# Altium PCB PCB1.PcbDoc
Units mil, origin at the board's own origin, x right, y up, seen from the top; angles counter-clockwise.
Board outline 1145 x 1300 mil, 2 copper layers (Top Layer, Bottom Layer); 4 components, 4 nets, 16 pads, 0 vias.
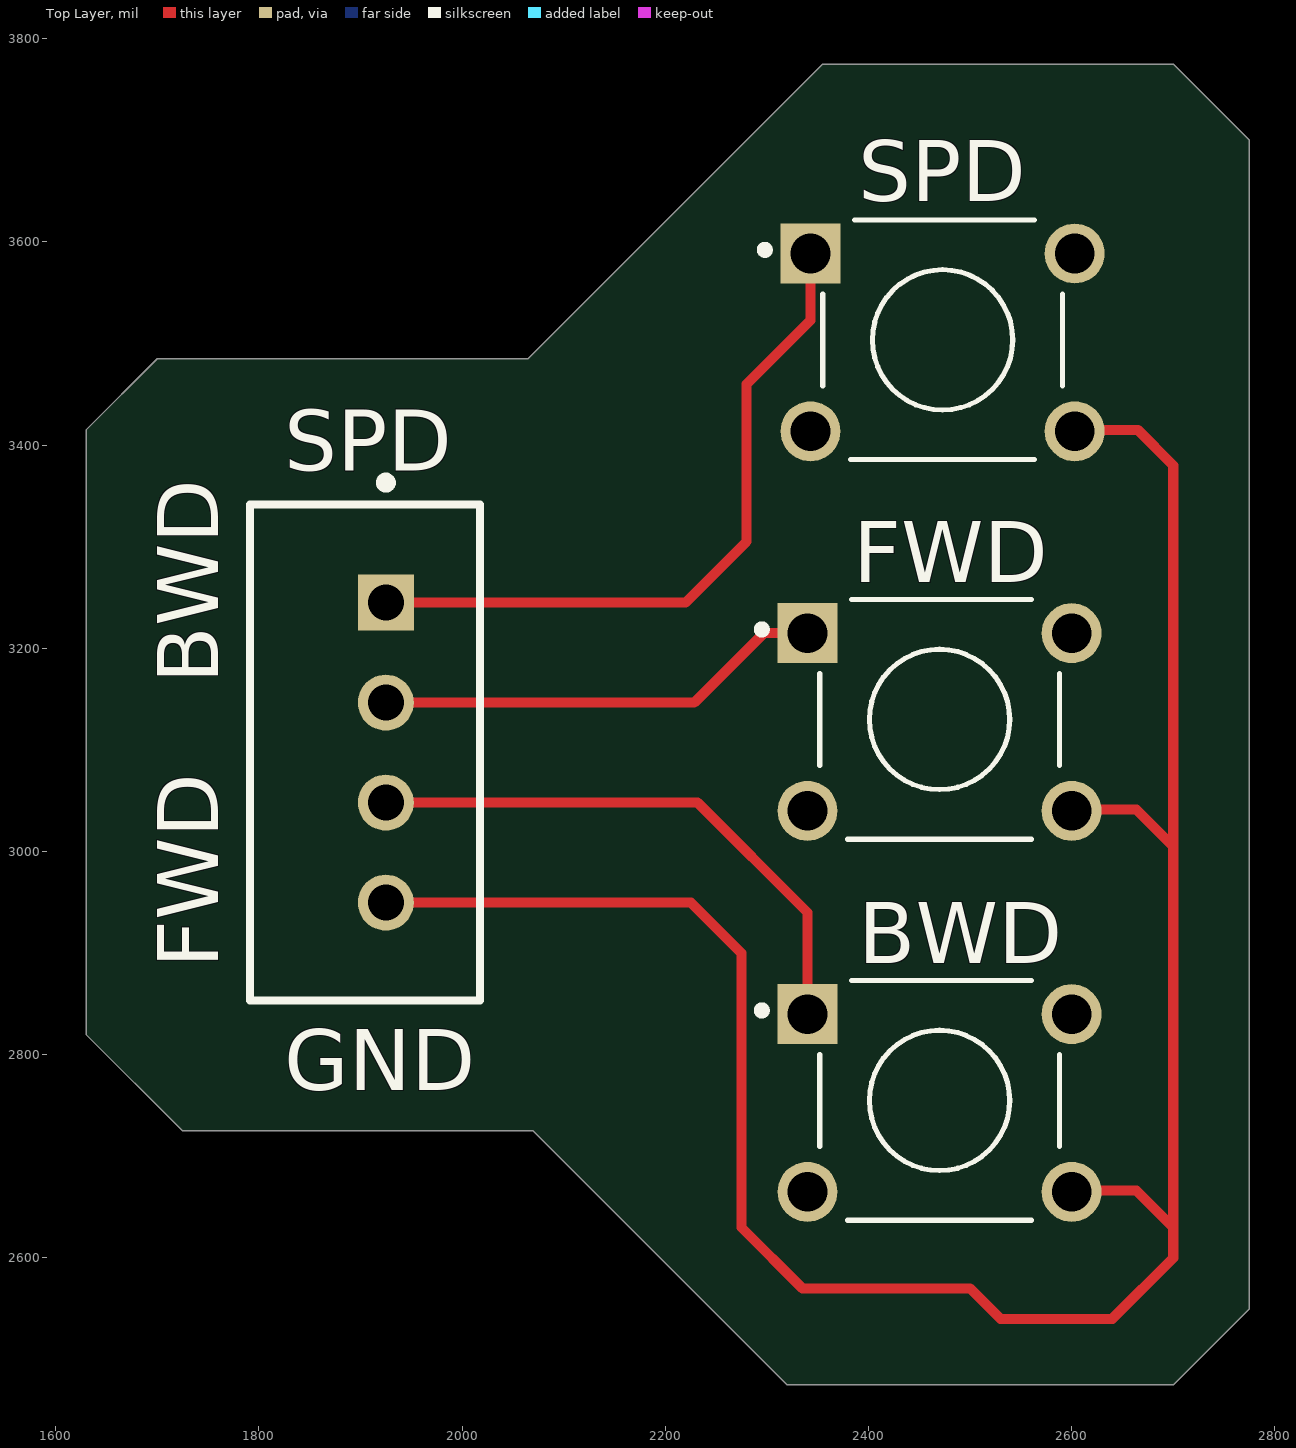
[diagram p0: Top Layer view]
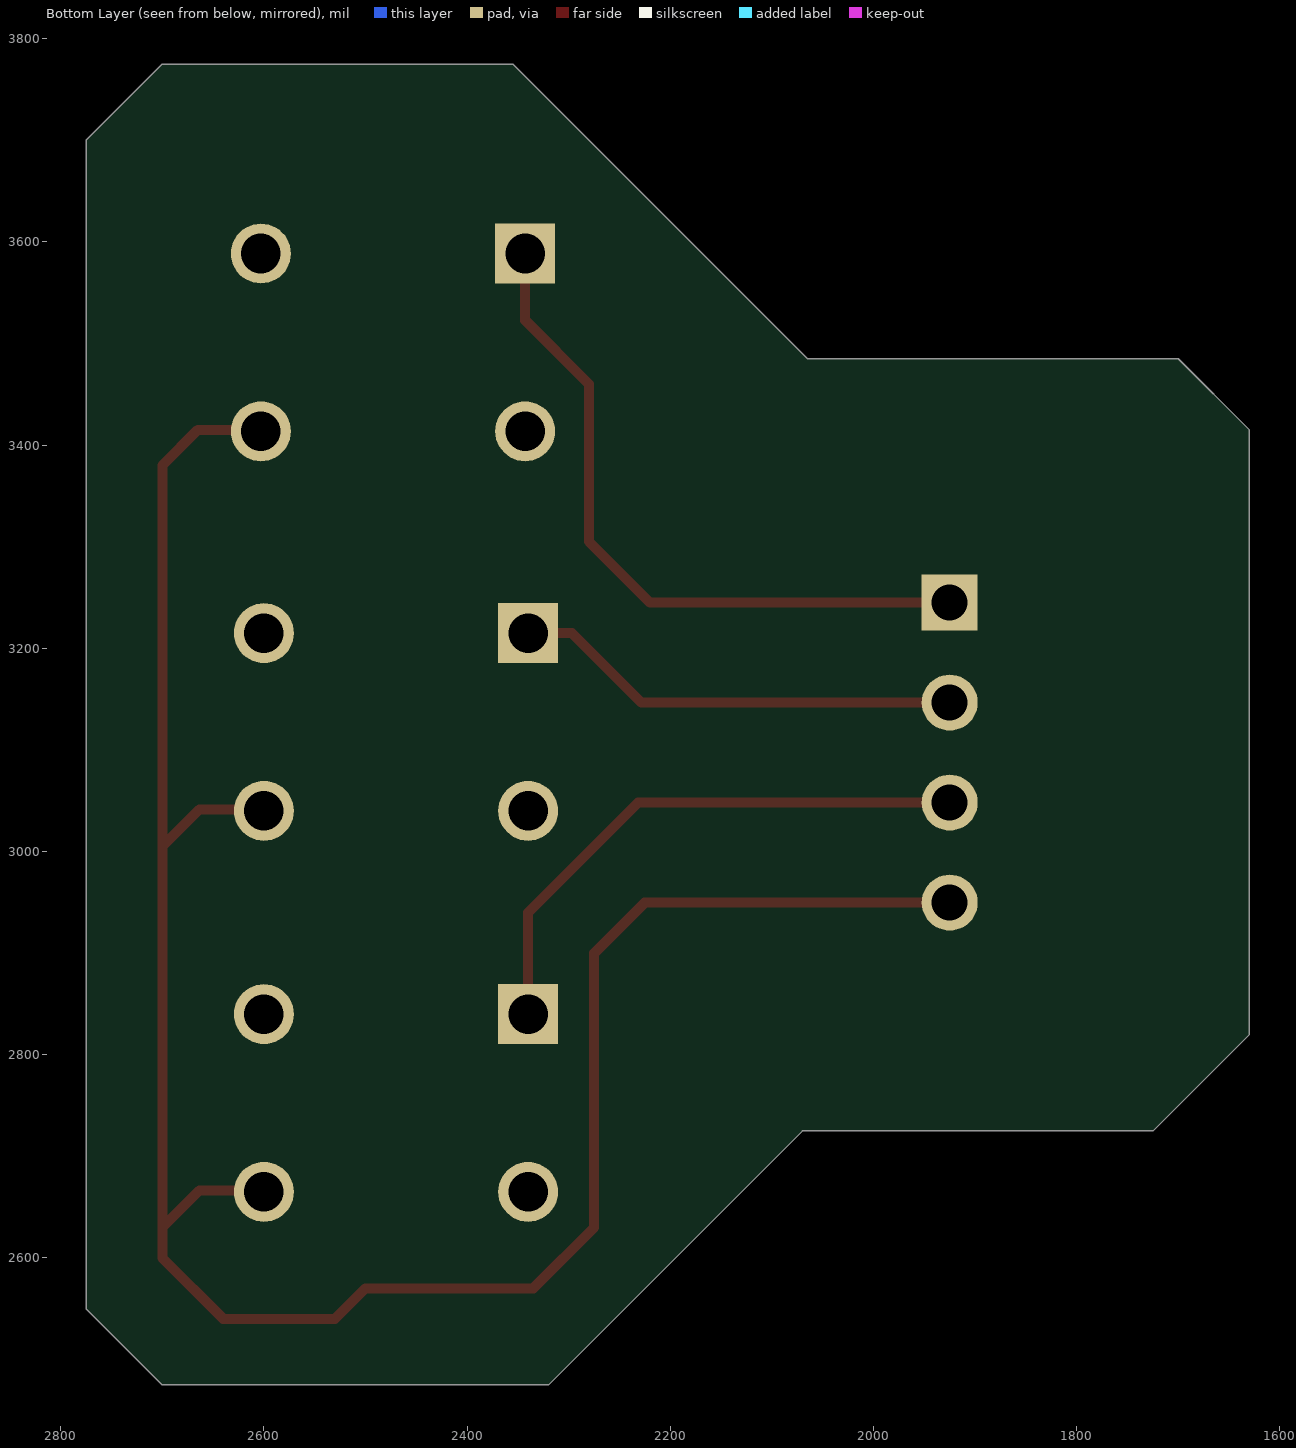
[diagram p1: Bottom Layer view, seen from below]
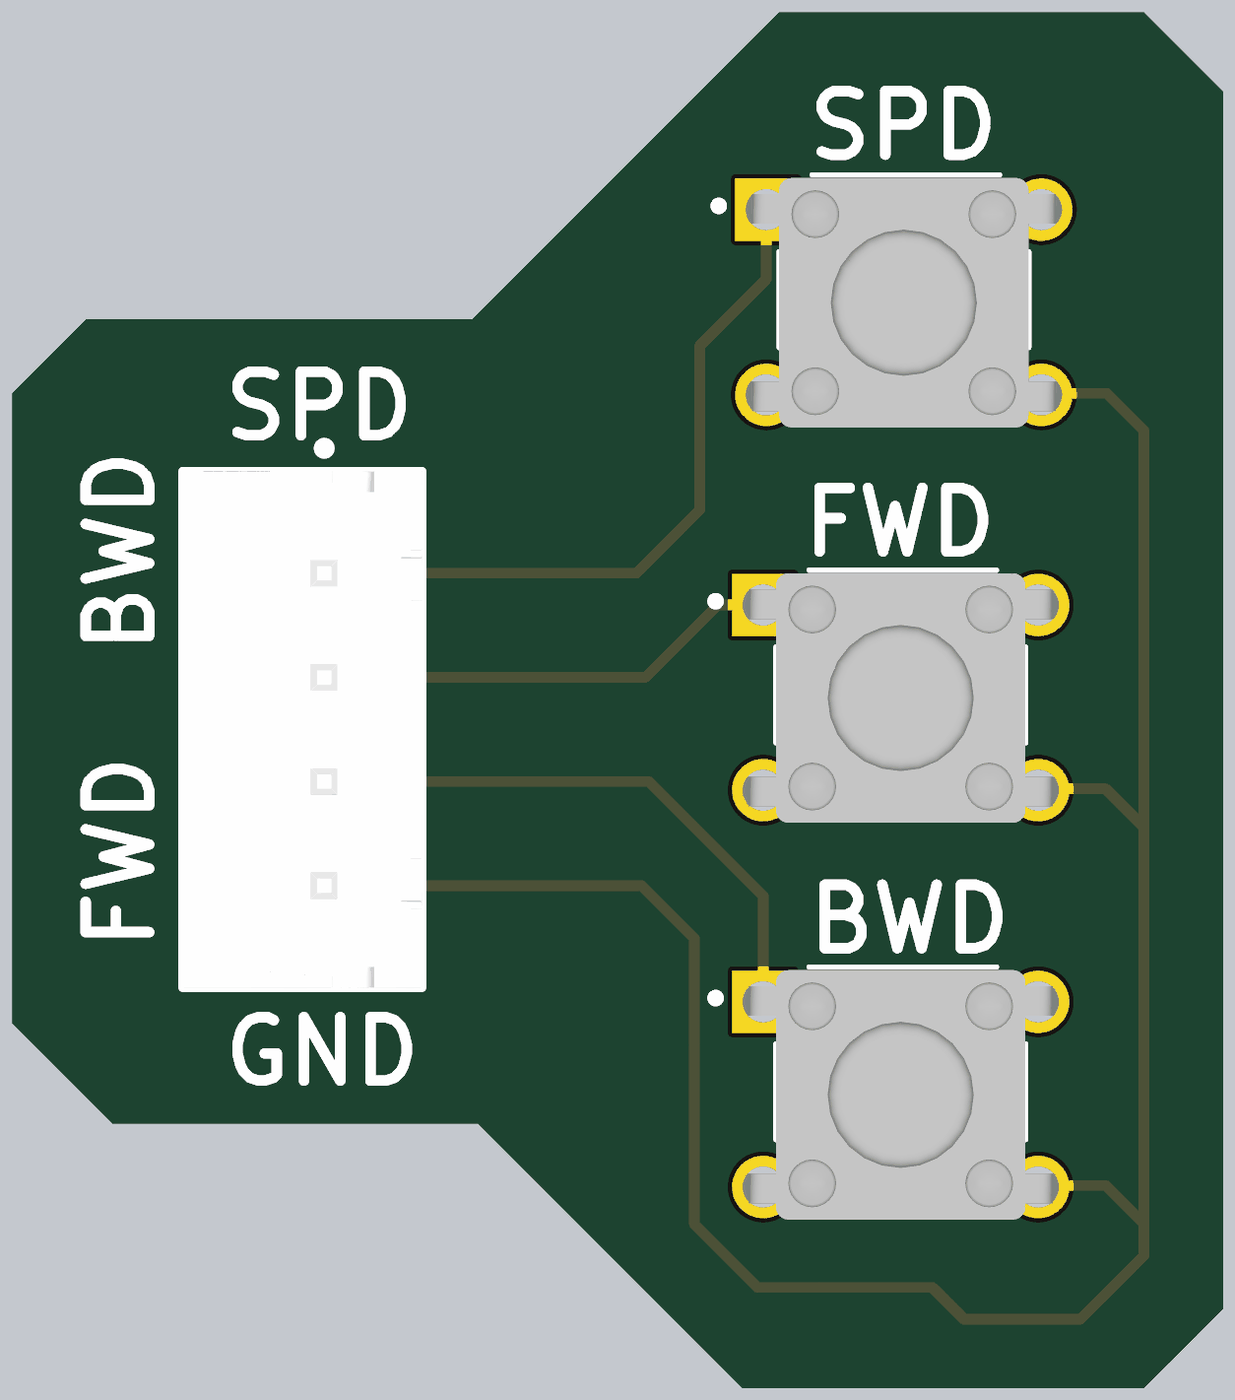
[diagram p2: 3D render of the assembled board from above, using the file's embedded part models]

## Layer stack, top to bottom
Top Solder: solder mask 0.4, Solder Resist, Dk 3.5
Top Layer: signal copper 1.4
Dielectric 1: dielectric 12.6, FR-4, Dk 4.8
Bottom Layer: signal copper 1.4
Bottom Solder: solder mask 0.4, Solder Resist, Dk 3.5

## Board outline
1630,2820 1630,3415 1700,3485 2065,3485 2355,3775 2700,3775 2775,3700 2775,2550 2700,2475 2320,2475 2070,2725 1725,2725

## Design rules (kind name [scope] priority, off if disabled: settings)
Clearance [All] p1: gap=10 ignorepadtopadclearanceinfootprint=FALSE
PolygonConnect [All] p1: connectstyle=Relief reliefconductorwidth=10 reliefentries=4 polygonreliefangle="90 Angle" airgapwidth=10
RoutingVias [All] p1: holewidth=28 width=50 viastyle="Through Hole" minholewidth=28 minwidth=50 maxholewidth=28 maxwidth=50
SolderMaskExpansion [All] p1: expansion=4 istentingtop=FALSE
Width [All] p1: maxlimit=10 minlimit=10 preferedwidth=10
30 further rules are at their usual default settings.

## Classes and differential pairs
component class Sheet1: BWD FWD SPD

## Components (designator, comment, footprint, x,y, rotation, side; value= is the part's Value field where it differs from the comment)
BWD "1825910-6" SW_1825910-6-4 2470,2755 r0 top
FWD "1825910-6" SW_1825910-6-4 2470,3130 r0 top
J? "B4B-XH-A(LF)(SN)" FP-B4B-XH-A_LF_SN-MFG 1904.33,3097.36 r90 top
SPD "1825910-6" SW_1825910-6-4 2472.95,3503.58 r0 top (schematic designator SPD-)

## Footprints (in the part's own frame and the unit in brackets; to place one, negate y for a bottom-side part, rotate by r counter-clockwise, add the part's x,y. Pads: shape width x height; smd on the part's side, far side on the other; paste and mask are expansions set on the pad)
FP-B4B-XH-A_LF_SN-MFG [mm]
  rect 1.4x1.4 hole 0.9 paste-2539.97 mask+0: 1(3.75,-0.525)
  round 1.4 hole 0.9 paste-2539.97 mask+0: 2(1.25,-0.525) 3(-1.25,-0.525) 4(-3.75,-0.525)
  silkscreen extent -6.2,-2.88 6.87,2.88, body extent -6.3,-2.98 6.3,2.98, height 0.25
SW_1825910-6-4 [mil]
  rect 58.98x58.98 / inner round 58.98 / far side rect 58.98x58.98 hole 38.98 mask+4.02: 1(-130,85)
  round 58.98 hole 38.98 mask+4.02: 2(130,85) 3(-130,-90) 4(130,-90)
  silkscreen extent -179,-118 118,118, body extent -154,-121 154,115, height 200

## Part data
BWD FWD SPD: "FSM4JH=6MM TACT SWITCH, HIGH TEMP", Package=None, Check_prices=https://www.snapeda.com/parts/1825910-6/TE+Connectivity+Alcoswitch+Switches/view-part/?ref=eda, MF="TE Connectivity", MP=1825910-6, SnapEDA_Link=https://www.snapeda.com/parts/1825910-6/TE+Connectivity+Alcoswitch+Switches/view-part/?ref=snap
J?: library part CMP-17439-000250-1, "CONN HEADER VERT 4POS 2.5MM", Color=Natural, Contact Resistance=20mR, Current Rating=3A, Flammability Rating="UL94 V-0", Housing Color=White, Insulation Resistance=1GR, Max Operating Temperature=85°C, Max Voltage Rating (AC)=250V, Min Operating Temperature=-25°C, Package Quantity=500, Connector Type=Header, Contact Finish - Mating=TIN, Contact Material=Brass, Contact Plating=Tin, Contact Shape=Square, Contact Type="Male Pin", Depth=5.75mm, Fastening Type=Detent, Gender=Male, Housing Material=Polyamide, Insulation Color=Natural, Insulation Material=Nylon, Lead Free="Lead Free", Lead Pitch=2.5mm, Length=12.4mm, Mated Stacking Heights=9.8mm, Material=Polyamide, Max Current Rating=3A, Max Voltage Rating (DC)=250V, Mount="Through Hole", Number of Contacts=4, Number of Positions=4, Number of Rows=1, Orientation=Straight, Packaging=Bulk, Pitch=2.5mm, REACH SVHC="No SVHC", Series=XH, Termination=Solder, Voltage Rating=250V, Voltage Rating (AC)=250V, Wire/Cable Gauge=22AWG

## Nets (pads, with @x,y where several pads share a name; then routed paths per layer and width w, separated by ;. In a path a pad name is that pad's centre, name@x,y a point inside that pad or via, vN(x,y) a via of type N, cw(c..) or ccw(c..) an arc to the next point about the centre after c; other vN are vias at no path point)
NetBWD_1: BWD.1 J?.3 | length 559.8
  Top Layer w10: J?.3 2231.85,3048.15 2340,2940 BWD.1
NetBWD_4: BWD.4 FWD.4 J?.4 SPD.4 | length 2255.6
  Top Layer w10: J?.4 2225.28,2949.72 2275,2900 2275,2630 2335,2570 2500,2570 2530,2540 2640,2540 2700,2600 2700,2630 ; BWD.4@2597.95,2666.42 2663.58,2666.42 2700,2630 ; FWD.4@2597.95,3041.42 2663.58,3041.42 2700,3005 ; SPD.4@2600.91,3415 2665,3415 2700,3380 2700,3005 ; 2700,2630 2700,3005
NetFWD_1: FWD.1 J?.2 | length 443.3
  Top Layer w10: J?.2 2228.43,3146.57 2296.85,3215 FWD.1
NetJ?_1: J?.1 SPD.1 | length 689.5
  Top Layer w10: J?.1 2220,3245 2280,3305 2280,3460 2342.95,3522.95 SPD.1
pads on no net: BWD.2 BWD.3 FWD.2 FWD.3 SPD.2 SPD.3

## Silkscreen, mask and mechanical layers (free items; w line width, h text height)
Top Overlay:
  text "SPD" at 1825,3375 h60
  text "BWD" at 1760,3165 h60 r90
  text "FWD" at 1760,2885 h60 r90
  text "GND" at 1825,2765 h60
Mechanical 1:
  lines w10: 1630,2820 1725,2725 2070,2725 2320,2475 2700,2475 2775,2550 2775,3700 2700,3775 2355,3775 2065,3485 1705,3485 1700,3485 1630,3415 1630,2820